# Altium PCB PCB.PcbDoc
Units mil, origin at the board's own origin, x right, y up, seen from the top; angles counter-clockwise.
Board outline 1860 x 1825 mil, 2 copper layers (Top Layer, Bottom Layer); 18 components, 16 nets, 73 pads, 39 vias.
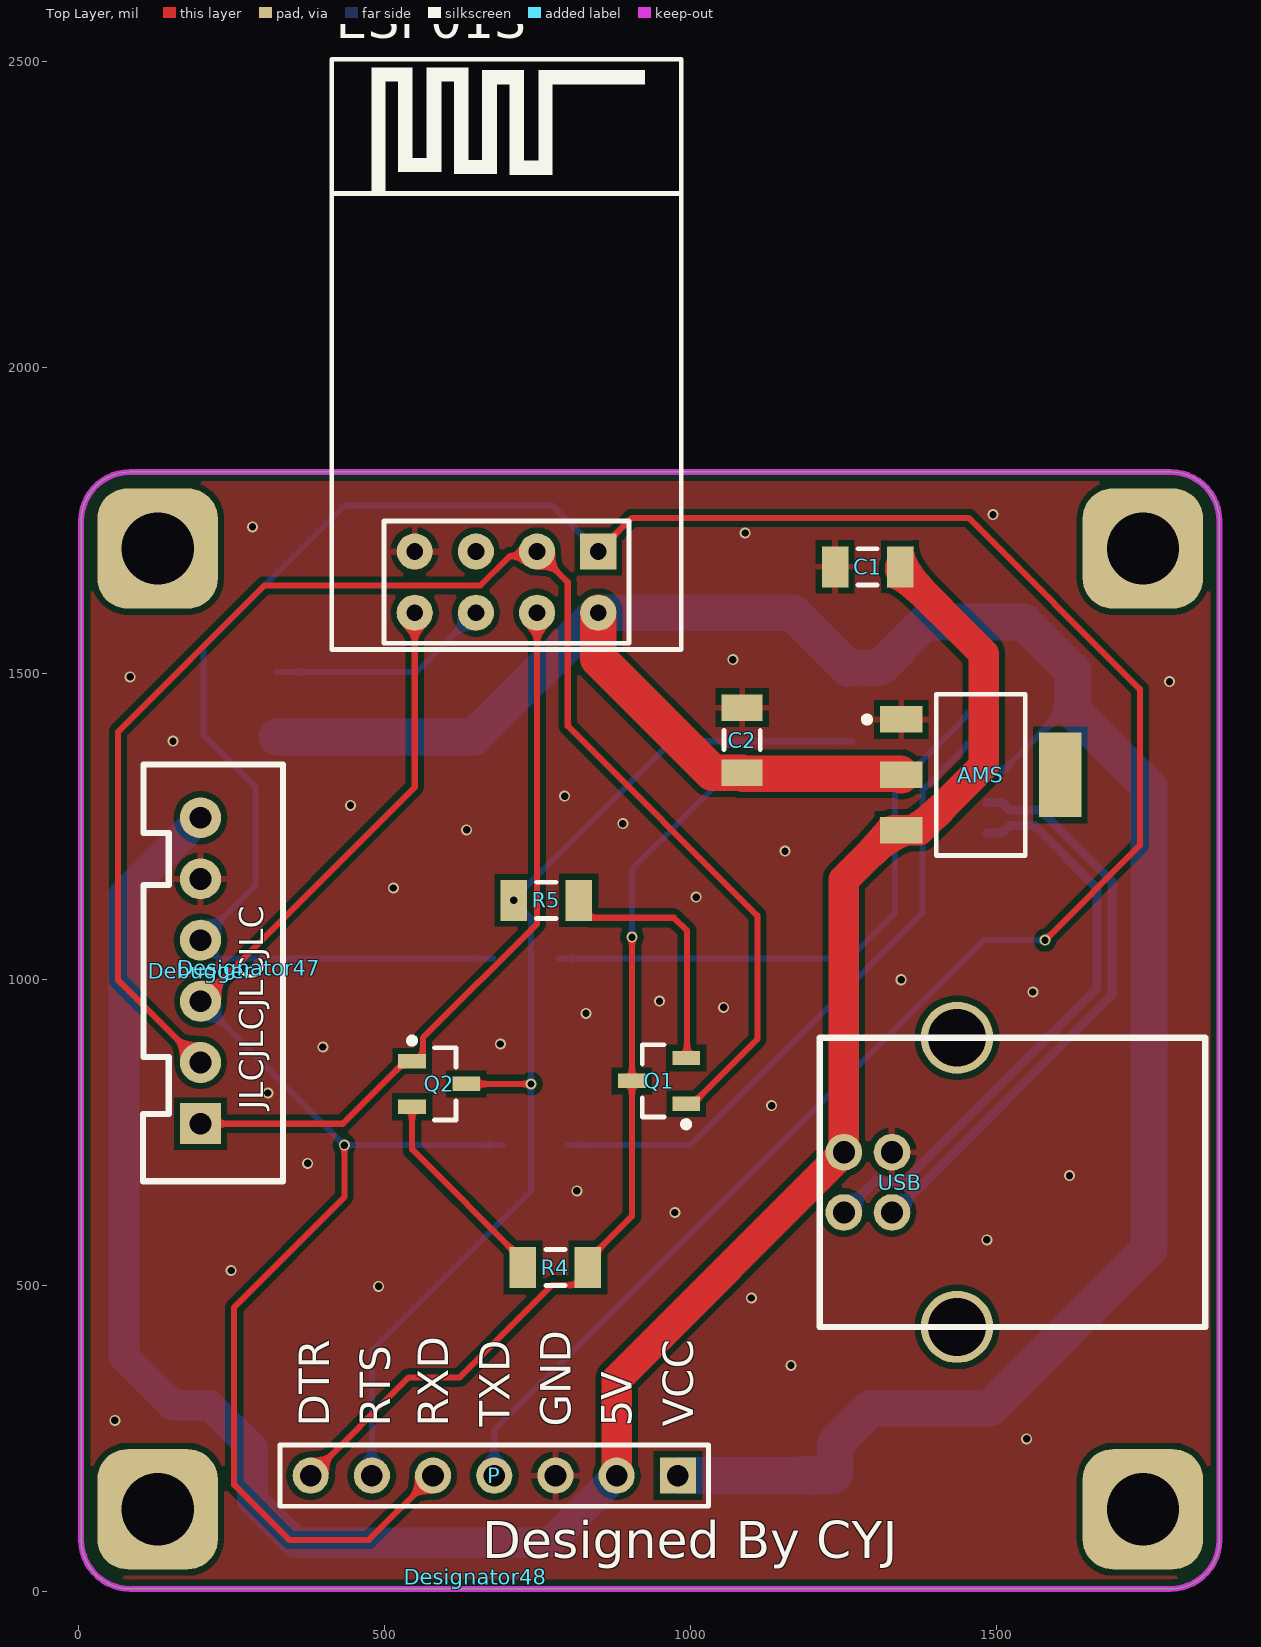
[diagram p0: Top Layer view]
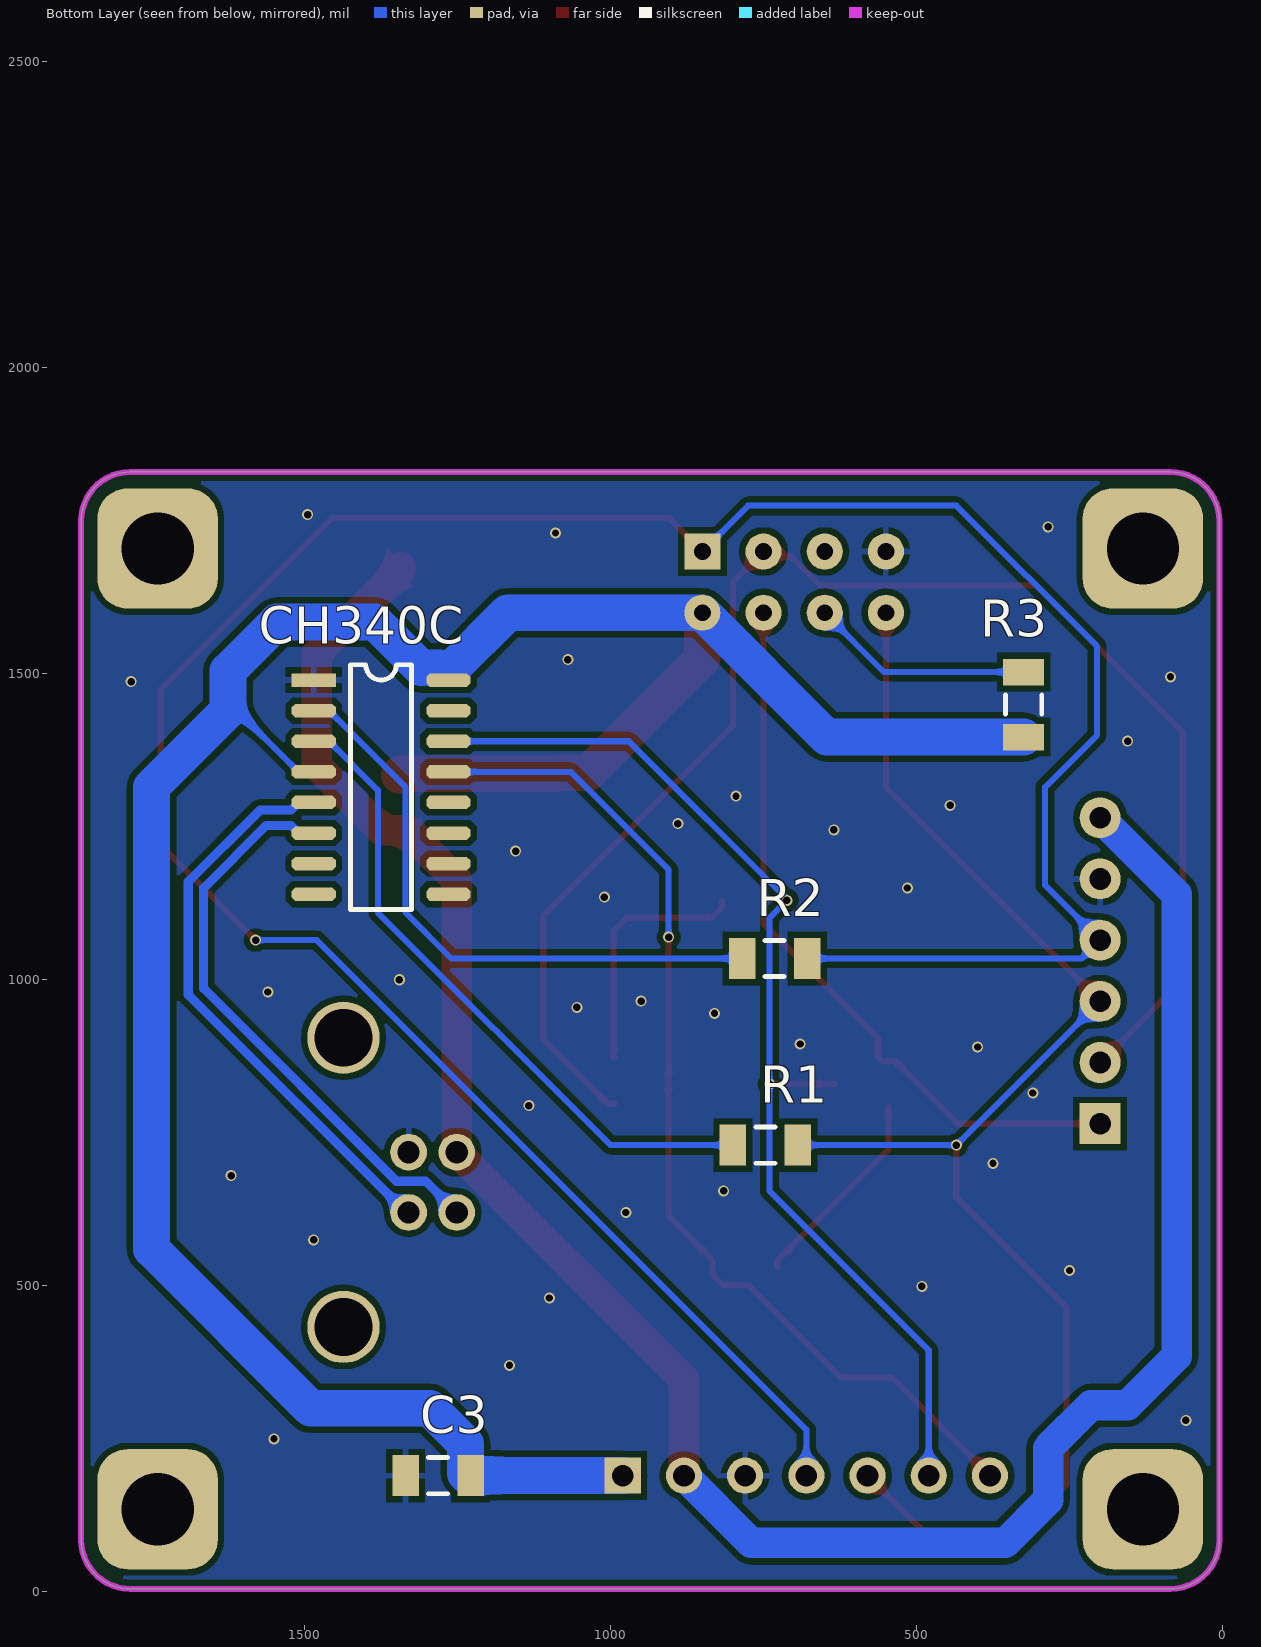
[diagram p1: Bottom Layer view, seen from below]

## Layer stack, top to bottom
Top Solder: solder mask 0.4, Solder Resist, Dk 3.5
Top Layer: signal copper 1.4
Dielectric 1: dielectric 12.6, FR-4, Dk 4.8
Bottom Layer: signal copper 1.4
Bottom Solder: solder mask 0.4, Solder Resist, Dk 3.5

## Board outline
5,85 5,1750 cw(c85,1750) 85,1830 1785,1830 cw(c1785,1750) 1865,1750 1865,85 cw(c1785,85) 1785,5 85,5 cw(c85,85)

## Design rules (kind name [scope] priority, off if disabled: settings)
Clearance [All] p1: gap=10 ignorepadtopadclearanceinfootprint=FALSE except(0: Arc-Hole Track-Hole SMDPad-Hole THPad-Hole Via-Hole Fill-Hole Poly-Hole Region-Hole Text-Hole)
ComponentClearance [InComponent('Designator47')] p1: gap=0 collisioncheckmode=3 verticalgap=0 showdistances=FALSE
DiffPairsRouting [All] p1: maxlimit=10 minlimit=10 mostfreqgap=10 toplayer_minwidth=15 toplayer_maxwidth=15 toplayer_prefwidth=15 bottomlayer_minwidth=15 bottomlayer_maxwidth=15 bottomlayer_prefwidth=15 maxuncoupledlength=500
PolygonConnect [All] p1: connectstyle=Relief reliefconductorwidth=10 reliefentries=4 polygonreliefangle="90 Angle" airgapwidth=10
RoutingVias [All] p1: holewidth=28 width=50 viastyle="Through Hole" minholewidth=28 minwidth=50 maxholewidth=28 maxwidth=50
SolderMaskExpansion [All] p1: expansion=4 istentingtop=FALSE
Width [All] p1: maxlimit=99 minlimit=10 preferedwidth=10 minimp=50.000000 maximp=50.000000 favimp=50.000000
28 further rules are at their usual default settings.

## Classes and differential pairs
component class CH340C_USB_Serial: AMS C1 C2 C3 CH340C Debugger ESP01S P Q1 Q2 R1 R2 R3 R4 R5 USB
differential pair D: +D_P -D_N

## Components (designator, comment, footprint, x,y, rotation, side; value= is the part's Value field where it differs from the comment)
AMS "AMS1117" SOT-223-2 1475,1335 r270 top locked
C1 "Cap Semi" C1206 1290,1675 r180 top value=10uF
C2 "Cap Semi" C1206 1085,1391.85 r90 top value=22uF
C3 "Cap" C1206 1281.85,190 r0 bottom value=0.1uF
CH340C "CH340C" SOP16 1485,1490 r270 bottom
Debugger "8266Debugger" XH2.54-LI-6P 200,1015 r90 top
Designator47 "Comment" JLC_CLI_NO 280,1020 r90 top
Designator48 "Comment" DesignedByCYJ 650,25 r0 top
ESP01S "ESP-01&01S Module" "ESP-01&01S Module" 700,1650 r0 top
P "Header 7" HDR1X7 980,190 r180 top
Q1 "J3Y" SOT-23B_N 949.29,835 r180 top
Q2 "J3Y" SOT-23B_N 590,830 r0 top
R1 "Res2" c1206 746.85,730 r0 bottom value=100
R2 "Res2" c1206 731.85,1035 r0 bottom value=100
R3 "Res2" c1206 325,1450 r90 bottom value=10K
R4 "Res2" c1206 780,530 r0 top value=10K
R5 "Res2" c1206 765,1130 r180 top value=10K
USB "USB" USB-B 1251.26,718.42 r180 top locked

## Footprints (in the part's own frame and the unit in brackets; to place one, negate y for a bottom-side part, rotate by r counter-clockwise, add the part's x,y. Pads: shape width x height; smd on the part's side, far side on the other; paste and mask are expansions set on the pad)
C1206 [mm] "Chip Capacitor, Body 3.2x1.6mm, IPC High Density"
  rect 1.1x1.7 smd: 1(-1.35,0) 2(1.35,0)
  silkscreen extent -0.4,-0.75 0.4,0.75, body extent -1.7,-0.9 1.7,0.9, height 1.3
c1206 [mm] "Chip Capacitor, Body 3.2x1.6mm, IPC High Density"
  rect 1.1x1.7 smd: 1(-1.35,0) 2(1.35,0)
  silkscreen extent -0.4,-0.75 0.4,0.75, body extent -1.7,-0.9 1.7,0.9, height 1.3
DesignedByCYJ [mil]
"ESP-01&01S Module" [mm]
  rect 1.5x1.5 hole 0.7: 1(3.81,1.27)
  round 1.5 hole 0.7: 2(1.27,1.27) 3(-1.27,1.27) 4(-3.81,1.27) 5(3.81,-1.27) 6(1.27,-1.27) 7(-1.27,-1.27) 8(-3.81,-1.27)
  silkscreen extent -7.25,-2.79 7.25,21.71
HDR1X7 [mm] "Connector; Header; 7 Position"
  rect 1.5x1.5 hole 0.9: 1(0,0)
  round 1.5 hole 0.9: 2(2.54,0) 3(5.08,0) 4(7.62,0) 5(10.16,0) 6(12.7,0) 7(15.24,0)
  silkscreen extent -1.27,-1.27 16.51,1.27
JLC_CLI_NO [mil]
SOP16 [mil]
  rect 22x72 smd: 1(0,0)
  oct 22x72 smd: 2(50,0) 3(100,0) 4(150,0) 5(200,0) 6(250,0) 7(300,0) 8(350,0) 9(350,220) 10(300,220) 11(250,220) 12(200,220) 13(150,220) 14(100,220) 15(50,220) 16(0,220)
  silkscreen extent -25,60 375,160
SOT-23B_N [mm] "SOT23, 3-Leads, Body 2.9x1.3mm, Pitch 0.95mm, Lead Span 2.4mm, IPC Medium Density"
  rect 1.15x0.6 smd: 1(-1.125,0.95) 2(-1.125,-0.95) 3(1.125,0)
  silkscreen extent -1.25,-1.5 0.7,1.92, body extent -0.7,-1.5 0.7,1.5, height 1.14
SOT-223-2 [mm] "SOT-223/SC-73; 4 Leads; Body 6.7 x 7.3 mm, inc. leads (LxW max)"
  rect 1.1x1.75 smd: 1(-2.3,-3.3) 2(0,-3.3) 3(2.3,-3.3)
  rect 3.5x1.75 smd: 4(0,3.3)
  silkscreen extent -3.35,-4.85 3.35,1.85, body extent -3.35,-3.7 3.35,3.5, height 1.85
USB-B [mm]
  round 1.524 hole 0.92: 1(0,0) 2(0,2.5) 3(-2,2.5) 4(-2,0)
  round 3 hole 2.4: 5(-4.7,7.25) 6(-4.7,-4.75)
  silkscreen extent -15,-4.75 1,7.25
XH2.54-LI-6P [mm] "接插件，6P"
  rect 1.7x1.7 hole 0.9: 1(-6.35,0)
  round 1.7 hole 0.9: 2(-3.81,0) 3(-1.27,0) 4(1.27,0) 5(3.81,0) 6(6.35,0)
  silkscreen extent -8.74,-3.43 8.56,2.39, body extent -8.85,-3.3 8.85,2.4, height 7.03

## Part data
C1 C2: "Capacitor (Semiconductor SIM Model)", LatestRevisionDate=29-May-2009, LatestRevisionNote="IPC-7351 Footprint Added.", PackageDescription="Chip Capacitor", PackageReference=C1206, Published=8-Jun-2000, Publisher="Altium Limited"
C3: "Capacitor", LatestRevisionDate=17-Jul-2002, LatestRevisionNote="Re-released for DXP Platform.", PackageDescription="Radial Cap, Thru-Hole; 2 Leads; 0.3 in Pin Spacing", PackageReference=RAD-0.3, Published=8-Jun-2000, Publisher="Altium Limited"
P: "Header, 7-Pin", LatestRevisionDate=17-Jul-2002, LatestRevisionNote="Re-released for DXP Platform.", Publisher="Altium Limited"
Q1 Q2: library part QNPN, "NPN Bipolar Transistor", LatestRevisionDate=29-May-2009, LatestRevisionNote="IPC-7351 Footprint Added.", PackageDescription="3-Pin SOT-23 Package 0.95 mm Pitch, 2.4 mm Lead Span", PackageReference=SOT-23B, PackageVersion=Aug-1999, Published=8-Jun-2000, Publisher="Altium Limited"
R1 R2 R3 R4 R5: "Resistor", LatestRevisionDate=17-Jul-2002, LatestRevisionNote="Re-released for DXP Platform.", PackageDescription="Axial Device, Thru-Hole; 2 Leads; 0.4 in Pin Spacing", PackageReference=AXIAL-0.4, Published=8-Jun-2000, Publisher="Altium Limited"

## Free pads (board coordinates)
  rrect50% 196.85x196.85 hole 118.11: 1(130,1705) 2(1740,1705) 3(1740,135) 4(130,135)

## Via types
v1: diameter 18, hole 12, Top Layer to Bottom Layer, tented both sides, 39 vias

## Nets (pads, with @x,y where several pads share a name; then routed paths per layer and width w, separated by ;. In a path a pad name is that pad's centre, name@x,y a point inside that pad or via, vN(x,y) a via of type N, cw(c..) or ccw(c..) an arc to the next point about the centre after c; other vN are vias at no path point)
3V3: AMS.2 C2.1 C3.1 CH340C.4 CH340C.16 ESP01S.5 P.1 R3.1 | length 4250
  Top Layer w60: ESP01S.5 850,1525 1036.3,1338.7 C2.1 1086.85,1336.85 1343.23,1336.85 AMS.2
  Bottom Layer w10: CH340C.4 1510,1340 1625,1455
  Bottom Layer w60: R3.1 646.85,1396.85 ESP01S.5 1168,1600 1259,1509 ; P.1 C3.1 1233.58,190 1237.05,193.46 1237.05,242.05 1295,300 1490,300 1750,560 1750,1315 1625,1440 1625,1455 1625,1505 1545,1585 1385,1585 1310,1510 1280,1510
5V: AMS.3 C1.1 Debugger.6 P.2 USB.1 | length 3773.4
  Top Layer w50: P.2 880,347.16 USB.1 1251.26,1163.43 1332.28,1244.45 1374.45,1244.45 1480,1350 1480,1533.03 1343.15,1669.88 C1.1
  Bottom Layer w50: Debugger.6 75,1140 75,385 155,305 215,305 285,235 285,150 355,80 770,80 P.2
D_N: CH340C.6 USB.2 | length 956.8
  Bottom Layer w15: USB.2 1302.18,670.92 1349.68,670.92 1665,986.25 1665,1150 1562.5,1252.5 1522.29,1252.5 1509.79,1240 CH340C.6
D_P: CH340C.5 USB.3 | length 950.6
  Bottom Layer w15: USB.3 1334.11,620 1690,975.89 1690,1160.36 1572.86,1277.5 1522.29,1277.5 1509.79,1290 CH340C.5
DTR: CH340C.13 P.7 Q1.3 R4.2 | length 1707.2
  Top Layer w10: P.7 540.46,350.46 623.64,350.46 774.72,501.54 816.5,501.54 833.15,518.19 R4.2 833.15,541.81 905,613.66 Q1.3 v1(905,1070)
  Bottom Layer w10: v1@905,1069.73 v1(905,1070) 905,1180 1065,1340 CH340C.13
GND: AMS.1 C1.2 C2.2 C3.2 CH340C.1 Debugger.5 ESP01S.4 P.3 USB.4
  other v1: 1550,250 60,280.27 1165,370.27 1100,480.27 491.18,499.16 250,525.27 1485,575.27 975,620 815,655.27 1620,680.27 375,700.27 1133.37,794.59 310,815.27 400,890.27 690,895.27 830,945.27 1055,955.27 950,965.27 1560,980.27 1345,1000.27 1010,1135.27 515,1150.27 1155,1210.27 635,1245.27 890,1255.27 445,1285.27 795,1300.27 155,1390.27 1783.4,1487.45 85,1495.27 1069.78,1523.26 1090,1730.27 285,1740.27 1495,1760.27
IO0: Debugger.2 ESP01S.2 Q1.1 | length 2509.2
  Top Layer w10: Debugger.2 65,1000 65,1405 304.53,1644.53 657.5,1644.53 705.47,1692.5 742.5,1692.5 ESP01S.2 800,1650 800,1415 1110,1105 1110,903.19 1004.41,797.6 Q1.1
NetCH340C_2: CH340C.2 R2.2 | length 987.8
  Bottom Layer w10: R2.2 1260,1035 1335,1110 1335,1315 1460,1440 CH340C.2
NetCH340C_3: CH340C.3 R1.2 | length 1075.5
  Bottom Layer w10: R1.2 1000,730 1380,1110 1380,1310 1460,1390 CH340C.3
NetESP01S_7: ESP01S.7 R3.2 | length 365.1
  Bottom Layer w10: R3.2 553.15,1503.15 ESP01S.7
NetQ1_2: Q1.2 R5.1 | length 412.7
  Top Layer w10: R5.1 818.15,1118.19 834.8,1101.54 973.46,1101.54 995,1080 995,873.82 Q1.2
NetQ2_2: Q2.2 R4.1 | length 337.6
  Top Layer w10: Q2.2 545.71,722.95 726.85,541.81 R4.1
RST: Debugger.1 ESP01S.6 Q2.1 | length 1211.7
  Top Layer w10: Debugger.1 432.48,765 534.88,867.4 Q2.1 556.54,867.4 563.35,874.21 563.35,905.17 750,1091.82 ESP01S.6
RTS: CH340C.14 P.6 Q2.3 R5.2 | length 1827.8
  Top Layer w10: Q2.3 v1(740,830)
  Bottom Layer w10: P.6 480,395 740,655 v1(740,830) 740,1101.85 v1(711.85,1130) ; v1@710,1130 970,1390 CH340C.14
RX: Debugger.3 ESP01S.8 P.5 R1.1 | length 2406.3
  Top Layer w10: Debugger.3 550,1315 ESP01S.8 ; v1(435,730) 435,645 255,465 255,175 345,85 475,85 P.5
  Bottom Layer w10: Debugger.3 v1(435,730) R1.1
TX: Debugger.4 ESP01S.1 P.4 R2.1 | length 4619.3
  Top Layer w10: ESP01S.1 905,1755 1455,1755 1735,1475 1735,1220 v1(1580,1065)
  Bottom Layer w10: R2.1 230.25,1035 200.25,1065 Debugger.4 290,1155 290,1315 205,1400 205,1545 435,1775 775,1775 ESP01S.1 ; P.4 680,265 1480,1065 v1(1580,1065)
pads on no net: AMS.4 CH340C.7 CH340C.8 CH340C.9 CH340C.10 CH340C.11 CH340C.12 CH340C.15 ESP01S.3 USB.5 USB.6

## Polygon pours and split planes (outlines as drawn)
GND on Bottom Layer "NONET_L-01_P-001" (solid, remove dead copper, pour order 0): 0,1915 15,1900 2065,1900 2065,90 1975,0 0,0
GND on Top Layer "NONET_L-01_P-001" (solid, remove dead copper, pour order 3): 0,1915 15,1900 2065,1900 2065,90 1975,0 0,0

## Keep-outs
Keep-Out Layer:
  the board outline again, w10

## Silkscreen, mask and mechanical layers (free items; w line width, h text height)
Top Overlay:
  text "DTR" at 410,270 h50 r90
  text "RTS" at 510,270 h50 r90
  text "RXD" at 605,270 h50 r90
  text "TXD" at 705,270 h50 r90
  text "GND" at 805,270 h50 r90
  text "5V" at 905,270 h50 r90
  text "VCC" at 1005,270 h50 r90
Mechanical 1:
  the board outline again, w10

## Text inside footprints (layer, text, board x,y; h text height)
Designator47: Top Overlay "JLCJLCJLCJLC" at 302.13,787.87 h39.37 r90
Designator48: Top Overlay "Designed By CYJ" at 660,54.99 h60